# EAGLE board Kelompok11_Board (EAGLE 7.2.0)
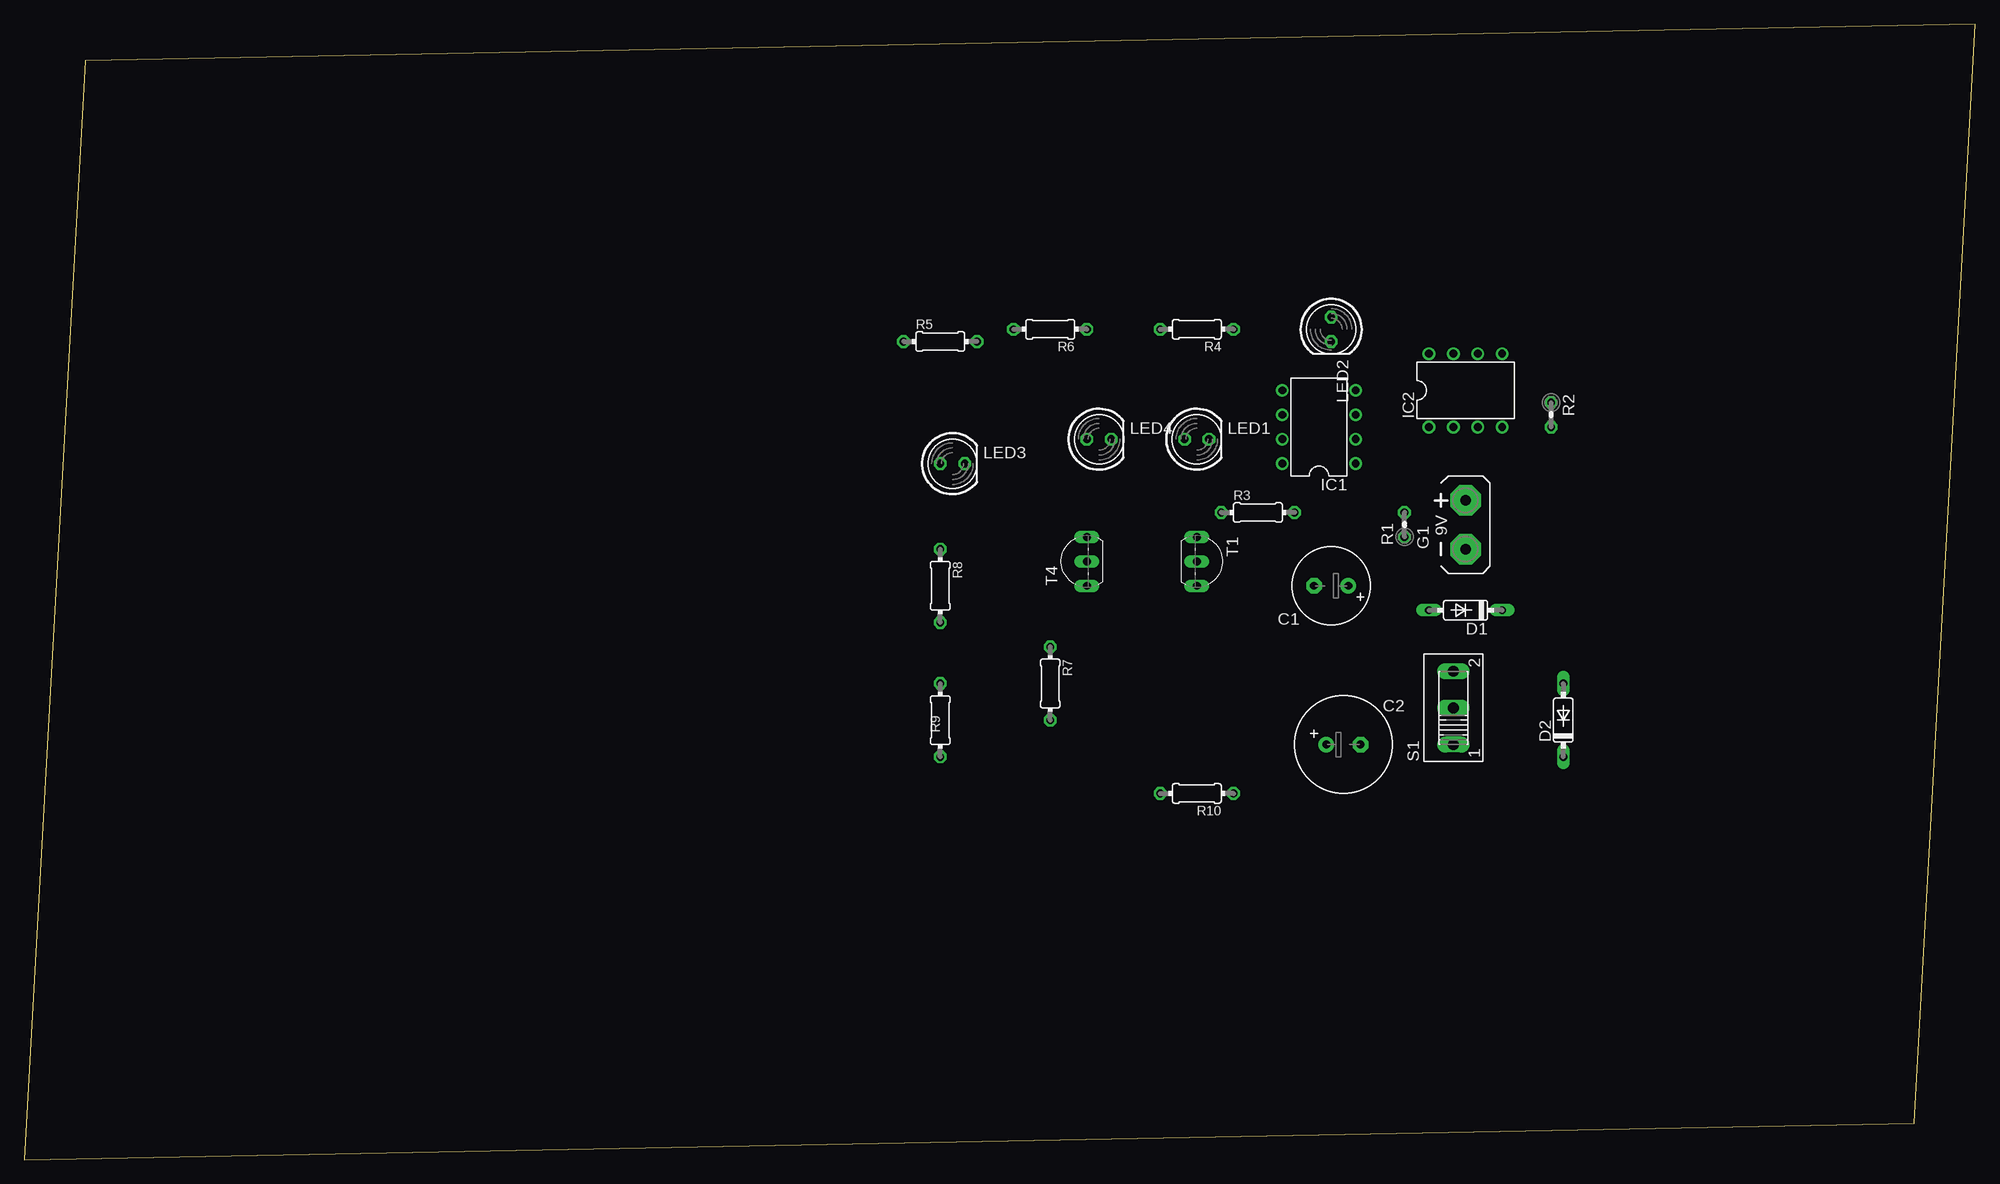
[diagram p0: board, top side]
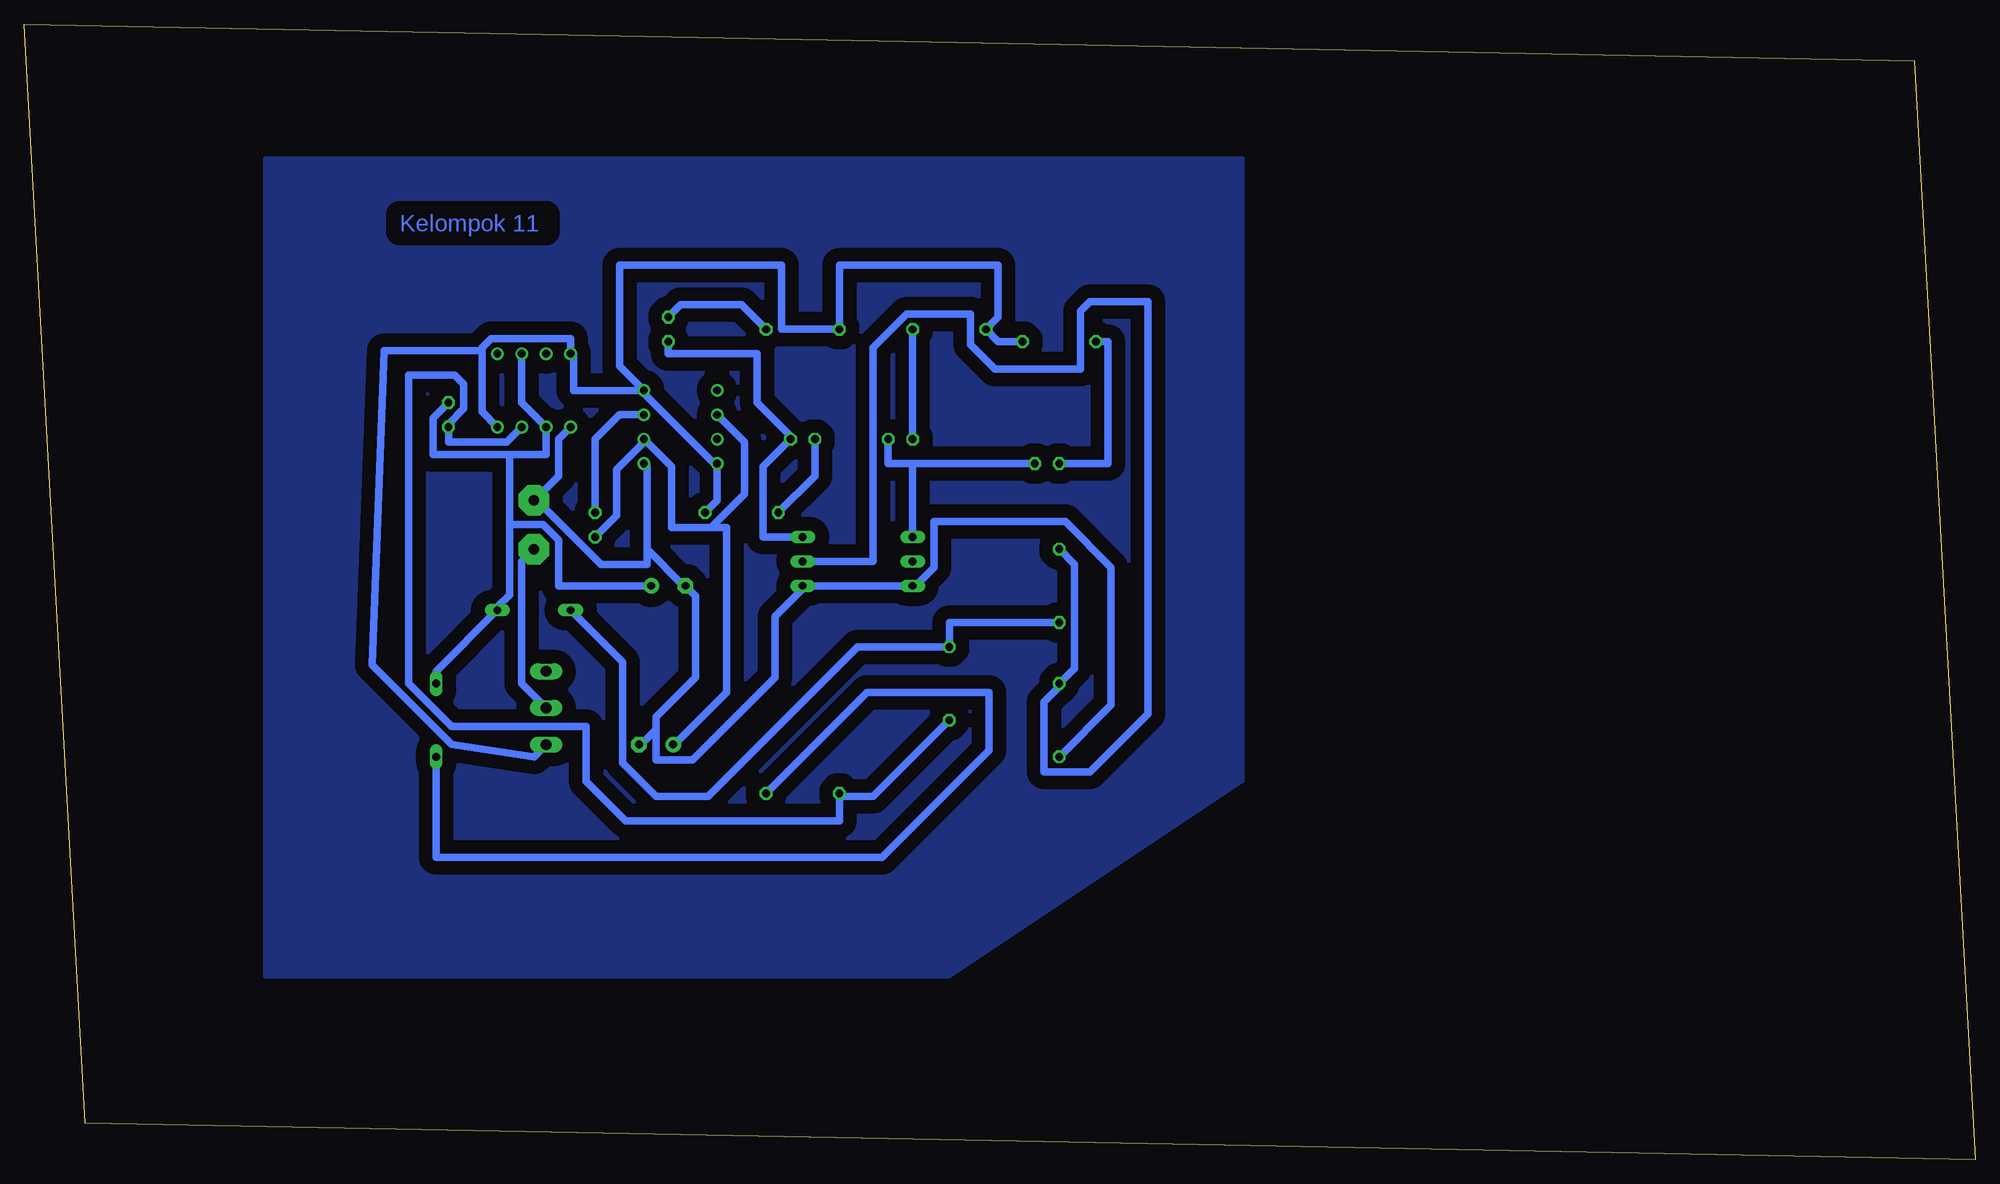
[diagram p1: board, bottom side, seen from below]

Size 202.87 x 118.1 mm. Coordinates in mm from the lower left corner, seen from the top.
Outline: 0,0 196.52,3.81 202.87,118.1 6.35,114.29 0,0
Copper layers (1*16): Top 0.035mm / dielectric 1.5mm / Bottom 0.035mm
Design rules "default *": minimum track width 30mil, minimum drill 0.35mm, track to track 15mil, track to pad 15mil, pad to pad 6mil, via to via 6mil, smd to smd 6mil, copper to edge 40mil, drill to drill 6mil, minimum pad ring 10mil, minimum via ring 8mil, stop-mask expansion 4mil, vias tented up to drill 0mil, thermal gap 10mil

## Footprints (pad centres in the part's own frame; a part is rotated, then mirrored left to right if it is on the bottom)
E3,5-8 = drill 0.813 pad 1.6: + -1.778,0 | drill 0.813 pad 1.6 octagon: - 1.778,0
E3,5-10 = drill 0.813 pad 1.6: + -1.778,0 | drill 0.813 pad 1.6 octagon: - 1.778,0
DO35-7 = drill 0.813 long: A 3.81,0; C -3.81,0
AB9V = drill 1.118 pad 3.15 octagon: + 0,2.54; - 0,-2.54
DIL08 = drill 0.813 pad 1.27: 1 -3.81,-3.81; 2 -1.27,-3.81; 3 1.27,-3.81; 4 3.81,-3.81; 5 3.81,3.81; 6 1.27,3.81; 7 -1.27,3.81; 8 -3.81,3.81
LED5MM = drill 0.813 octagon: A -1.27,0; K 1.27,0
0204V = drill 0.813 octagon: 1 -1.27,0; 2 1.27,0
0204/7 = drill 0.813 octagon: 1 -3.81,0; 2 3.81,0
255SB = drill 1.118 long: 1 -3.81,0; 2 0,0; 3 3.81,0
TO92-CBE = drill 0.813 long: B 0,0; C -2.54,0; E 2.54,0
TO92-EBC = drill 0.813 long: B 0,-1.27; C 2.54,-1.27; E -2.54,-1.27

## Placement (x,y rotation side)
C1  [E3,5-8]  135.89,59.69 180 top
C2  [E3,5-10]  137.16,43.18 0 top
D1  1N4148DO35-7  [DO35-7]  149.86,57.15 180 top
D2  1N4148DO35-7  [DO35-7]  160.02,45.72 90 top
G1  AB9V  [AB9V]  149.86,66.04 0 top
IC1  NE555N  [DIL08]  134.62,76.2 90 top
IC2  NE555N  [DIL08]  149.86,80.01 0 top
LED1  [LED5MM]  121.92,74.93 0 top
LED2  [LED5MM]  135.89,86.36 270 top
LED3  [LED5MM]  96.52,72.39 0 top
LED4  [LED5MM]  111.76,74.93 0 top
R1  [0204V]  143.51,66.04 90 top
R2  [0204V]  158.75,77.47 270 top
R3  [0204/7]  128.27,67.31 0 top
R4  [0204/7]  121.92,86.36 180 top
R5  [0204/7]  95.25,85.09 0 top
R6  [0204/7]  106.68,86.36 180 top
R7  [0204/7]  106.68,49.53 270 top
R8  [0204/7]  95.25,59.69 270 top
R9  [0204/7]  95.25,45.72 90 top
R10  [0204/7]  121.92,38.1 180 top
S1  [255SB]  148.59,46.99 90 top
T1  [TO92-CBE]  121.92,62.23 270 top
T4  [TO92-EBC]  109.22,62.23 90 top

## Library data of the parts
C1 C2 = rcl; SPICEPREFIX: C
D1 D2 = diode
G1 = battery
IC1 IC2 = linear
LED1-LED4 = led
R1-R10 = rcl; SPICEPREFIX: R
S1 = switch
T1 T4 = transistor

## Nets
N$1: LED1.A R3.1
N$2: LED2.A R4.1
N$3: LED3.A R5.1
N$4: LED4.A R6.1
N$5: G1.- S1.2
N$6: IC2.3 R2.2 R7.2 R10.2
N$7: C1.- C2.- G1.+ IC1.1 IC2.1 R9.1 T1.E T4.E
N$8: C2.+ IC1.2 IC1.6 R1.1
N$9: IC1.4 IC1.8 IC2.4 IC2.8 R3.2 R4.2 R5.2 R6.2 S1.1
N$10: IC1.3 R1.2
N$11: C1.+ D1.C D2.A IC2.2 IC2.6 R2.1
N$12: D1.A R7.1 R8.2
N$13: R8.1 R9.2 T1.B
N$14: LED1.K LED2.K T1.C
N$15: LED3.K LED4.K T4.C
N$16: D2.C R10.1

## Tracks (layer width: path | path; a pad name or v marks a point on that pad's centre or on a via)
N$1
  Bottom 0.762: R3.1 120.65,71.12 LED1.A
N$2
  Bottom 0.762: LED2.A 134.62,88.9 128.27,88.9 R4.1
N$3
  Bottom 0.762: LED3.A 90.17,72.39 90.17,85.09 R5.1
N$4
  Bottom 0.762: R6.1 LED4.A
N$5
  Bottom 0.762: S1.2 151.13,49.53 151.13,62.23 G1.-
N$6
  Bottom 0.762: IC2.3 152.72,74.61 158.75,74.61 R2.2 158.75,76.52 157.16,78.1 157.16,80.65 158.12,81.6 162.88,81.6 162.88,49.53 158.43,45.09 144.46,45.09 144.46,39.37 140.33,35.24 118.11,35.24 R10.2 118.11,37.78 114.62,37.78 R7.2
N$7
  Bottom 0.762: R9.1 89.85,47.31 89.85,61.59 94.61,66.36 108.27,66.36 108.27,61.59 110.17,59.69 T4.E T1.E 121.92,59.37 124.78,56.52 124.78,50.16 133.35,41.59 137.16,41.59 137.16,43.5 137.16,44.45 | IC2.1 147.32,74.93 147.32,71.12 G1.+ 149.54,68.58 142.88,61.91 138.11,61.91 138.11,63.5 | IC1.1 138.11,72.07 138.11,63.5 | 138.11,63.5 134.3,59.69 C1.- 133.03,58.61 133.03,50.16 137.16,46.04 137.16,44.45 | C2.- 138.75,43.18 137.32,44.61 137.16,44.45
N$8
  Bottom 0.762: IC1.6 127.95,74.61 127.95,69.22 131.44,65.72 | 131.44,65.72 135.57,65.72 135.57,72.07 IC1.2 138.43,74.61 141.29,71.75 141.29,66.99 R1.1 | 131.44,65.72 129.86,65.72 129.86,48.58 135.25,43.18 C2.+
N$9
  Bottom 0.762: R5.2 101.6,85.09 R6.2 101.6,87.63 101.6,93.03 118.11,93.03 R4.2 124.14,86.36 124.14,93.03 140.97,93.03 140.97,82.55 IC1.4 | R3.2 130.81,68.58 IC1.8 131.13,72.39 138.43,79.69 IC1.4 | IC2.4 155.26,77.79 155.26,84.14 | 155.26,84.14 155.26,84.46 154.31,85.41 146.05,85.41 IC2.8 145.73,83.82 145.73,80.01 IC1.4 | S1.1 149.86,41.91 158.43,43.18 166.69,51.44 165.42,84.14 155.26,84.14
N$10
  Bottom 0.762: IC1.3 140.97,77.47 143.51,74.93 R1.2
N$11
  Bottom 0.762: D2.A 160.02,50.8 D1.C 153.67,57.47 152.4,58.74 152.4,66.04 | IC2.6 151.13,78.74 IC2.2 148.59,73.34 152.4,73.34 | R2.1 160.34,77.15 160.34,73.34 152.4,73.34 | C1.+ 147.32,59.69 147.32,64.45 148.91,66.04 152.4,66.04 | 152.4,73.34 152.4,66.04
N$12
  Bottom 0.762: R8.2 106.68,55.88 R7.1 116.2,53.34 131.76,37.78 137.16,37.78 140.65,41.27 140.65,51.75 D1.A
N$13
  Bottom 0.762: R8.1 93.66,61.91 93.66,51.12 R9.2 95.25,49.21 96.84,47.62 96.84,40.32 92.07,40.32 86.04,46.36 86.04,89.22 92.07,89.22 93.03,88.26 93.03,82.23 101.92,82.23 104.46,84.77 104.46,87.95 111.12,87.95 114.62,84.46 114.62,62.23 T1.B
N$14
  Bottom 0.762: T1.C 126.05,64.77 126.05,72.07 LED1.K 123.19,75.25 126.68,78.74 126.68,83.82 135.89,83.82 LED2.K
N$15
  Bottom 0.762: 110.49,72.39 113.03,72.39 LED4.K | 110.49,72.39 LED3.K | 110.49,72.39 T4.C
N$16
  Bottom 0.762: R10.1 115.25,48.58 102.55,48.58 102.55,42.55 113.66,31.43 160.02,31.43 D2.C
N$17
  pour Bottom (isolate 1.422): 76.2,95.25 76.2,39.37 106.68,19.05 173.99,19.05 177.8,19.05 177.8,97.79 177.8,104.14 76.2,104.14

## Text on the board
Bottom: Kelompok 11